# EAGLE board Mug Temperature Sensor (EAGLE 5.11)
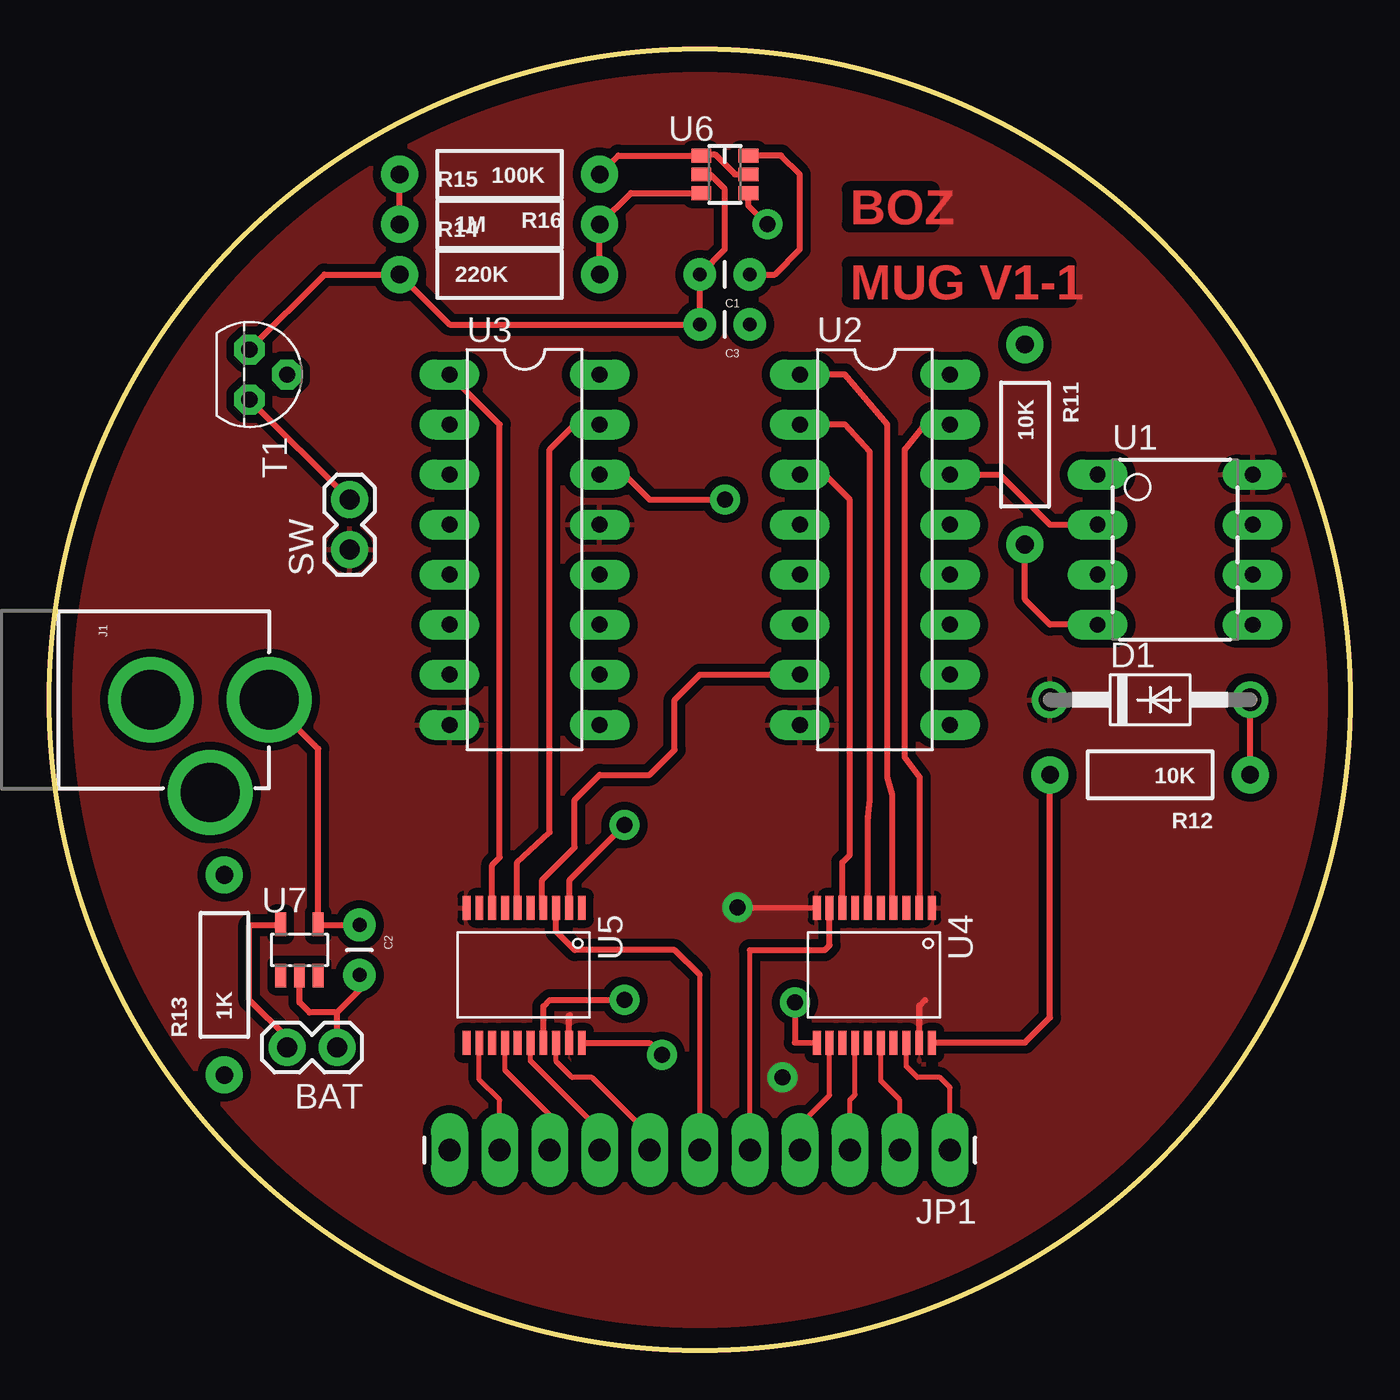
[diagram p0: board, top side]
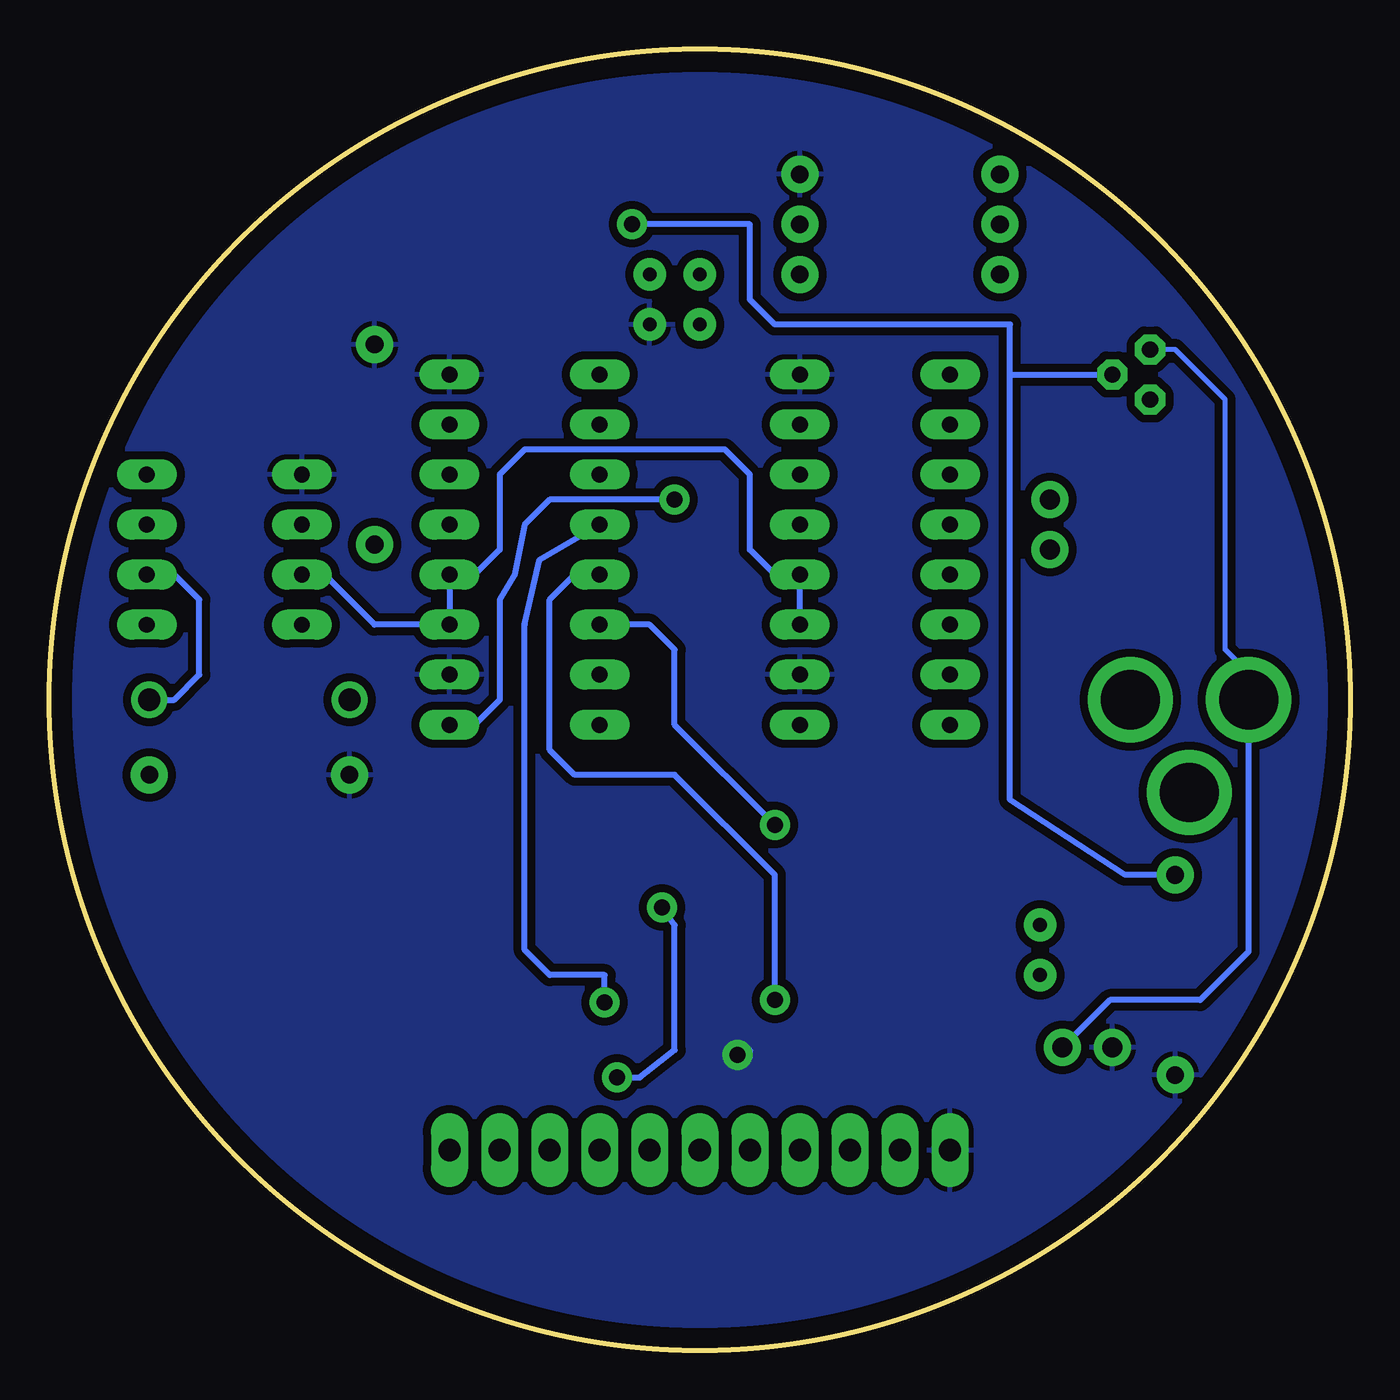
[diagram p1: board, bottom side, seen from below]

Size 66.04 x 66.04 mm. Coordinates in mm from the lower left corner, seen from the top.
Outline: circle at 33.02,33.02 radius 33.02
Copper layers (1*16): Top 0.035mm / dielectric 1.5mm / Bottom 0.035mm
Design rules "default *": minimum track width 8mil, minimum drill 24mil, track to track 8mil, track to pad 8mil, pad to pad 8mil, via to via 8mil, smd to smd 8mil, copper to edge 40mil, drill to drill 8mil, minimum pad ring 14mil, minimum via ring 14mil, stop-mask expansion 4mil, vias tented up to drill 0mil, thermal gap 10mil

## Footprints (pad centres in the part's own frame; a part is rotated, then mirrored left to right if it is on the bottom)
1X02 = drill 1.016 pad 1.88 round: 1 0,0; 2 2.54,0
CAP-PTH-SMALL = drill 0.7 pad 1.651 round: 1 0,0; 2 2.54,0
DO41-10 = drill 1.118 round: A 5.08,0; C -5.08,0
POWER_JACK_PTH = drill 2.997 pad 4.318 round: GND 0,7.7; GNDBREAK 4.7,10.7; PWR 0,13.7
1X11_LONGPADS = drill 1.118 pad 1.88 long: 1 0,0; 2 2.54,0; 3 5.08,0; 4 7.62,0; 5 10.16,0; 6 12.7,0; 7 15.24,0; 8 17.78,0; 9 20.32,0; 10 22.86,0; 11 25.4,0
AXIAL-0.4 = drill 0.9 pad 1.88 round: P$1 -5.08,0; P$2 5.08,0
TO92 = drill 0.813 octagon: 1 1.27,0; 2 0,1.905; 3 -1.27,0
DIP-8-300 = drill 0.8 long: 1 -3.937,3.81; 2 -3.937,1.27; 3 -3.937,-1.27; 4 -3.937,-3.81; 5 3.937,-3.81; 6 3.937,-1.27; 7 3.937,1.27; 8 3.937,3.81
DIL16 = drill 0.813 long: 1 -8.89,-3.81; 2 -6.35,-3.81; 3 -3.81,-3.81; 4 -1.27,-3.81; 5 1.27,-3.81; 6 3.81,-3.81; 7 6.35,-3.81; 8 8.89,-3.81; 9 8.89,3.81; 10 6.35,3.81; 11 3.81,3.81; 12 1.27,3.81; 13 -1.27,3.81; 14 -3.81,3.81; 15 -6.35,3.81; 16 -8.89,3.81
20-SSOP = smd 1.2 x 0.4: P$1 -3.4,2.9; P$2 -3.4,2.25; P$3 -3.4,1.6; P$4 -3.4,0.95; P$5 -3.4,0.3; P$6 -3.4,-0.35; P$7 -3.4,-1; P$8 -3.4,-1.65; P$9 -3.4,-2.3; P$10 -3.4,-2.95; P$11 3.45,-2.95; P$12 3.45,-2.3; P$13 3.45,-1.65; P$14 3.45,-1; P$15 3.45,-0.35; P$16 3.45,0.3; P$17 3.45,0.95; P$18 3.45,1.6; P$19 3.45,2.25; P$20 3.45,2.9
6-SOT23 = smd 1 x 0.7: P$1 -1.2,0.95; P$2 -1.2,0; P$3 -1.2,-0.95; P$4 1.2,-0.95; P$5 1.2,0; P$6 1.2,0.95
SOT23-5L = smd 0.55 x 1.2: 1 -0.95,-1.3; 2 0,-1.3; 3 0.95,-1.3; 4 0.95,1.3; 5 -0.95,1.3

## Placement (x,y rotation side)
BAT  [1X02]  14.61,15.37 180 top
C1  .1uF  [CAP-PTH-SMALL]  35.56,54.61 180 top
C2  .1uF  [CAP-PTH-SMALL]  15.75,21.59 270 top
C3  .1uF  [CAP-PTH-SMALL]  35.56,52.07 180 top
D1  1N4004  [DO41-10]  55.88,33.02 0 top
J1  POWER_JACKPTH  [POWER_JACK_PTH]  -2.54,33.02 270 top
JP1  M11LONGPADS  [1X11_LONGPADS]  45.72,10.16 180 top
R11  10K  [AXIAL-0.4]  49.53,45.97 270 top
R12  10K  [AXIAL-0.4]  55.88,29.21 180 top
R13  1K  [AXIAL-0.4]  8.89,19.05 90 top
R14  220K  [AXIAL-0.4]  22.86,54.61 0 top
R15  1M  [AXIAL-0.4]  22.86,57.15 0 top
R16  100K  [AXIAL-0.4]  22.86,59.69 180 top
SW  [1X02]  15.24,40.64 90 top
T1  2N3904  [TO92]  10.16,49.53 270 top
U1  PIC12F615-DIP8  [DIP-8-300]  57.15,40.64 0 top
U2  74LS595N  [DIL16]  41.91,40.64 270 top
U3  74LS595N  [DIL16]  24.13,40.64 270 top
U4  SN74LV244ADBR20SSOP  [20-SSOP]  41.91,19.05 270 top
U5  SN74LV244ADBR20SSOP  [20-SSOP]  24.13,19.05 270 top
U6  MAX16052SMD  [6-SOT23]  34.29,59.69 0 top
U7  MAX1555  [SOT23-5L]  12.7,20.32 0 top

## Library data of the parts
BAT C1-C3 J1 JP1 R11-R16 SW = SparkFun
D1 = diode
T1 = transistor
U1 U4-U6 = boztalay_custom
U2 U3 = 74xx-us
U7 = maxim; MF: MAXIM; MPN: MAX1555EZK+T; OC_FARNELL: 1628222; OC_NEWARK: 59J2761

## Nets
2_GND: D1.C SW.1 U1.8 U2.8 U3.8 U3.13 U4.P$1 U4.P$10 U4.P$19 U5.P$10 U5.P$19
GND: BAT.1 C1.2 C2.2 C3.2 J1.GND R14.P$1 T1.3 U6.P$2 U7.2
N$1: U1.3 U2.11 U2.12 U3.11 U3.12
N$2: U1.2 U2.14
N$3: U2.9 U3.14
N$5: U2.13
N$6: JP1.10 U5.P$12
N$7: JP1.9 U5.P$14
N$8: JP1.8 U5.P$16
N$9: U5.P$9
N$10: JP1.7 U5.P$18
N$11: JP1.6 U5.P$3
N$12: U2.5 U5.P$17
N$13: U3.15 U5.P$6
N$14: U2.6 U5.P$2
N$16: U2.4 U4.P$11
N$17: U2.2 U4.P$6
N$19: U2.15 U4.P$2
N$22: U2.7 U5.P$4
N$25: U3.1 U5.P$8
N$26: JP1.1 U4.P$18
N$27: JP1.2 U4.P$16
N$28: JP1.3 U4.P$14
N$29: JP1.4 U4.P$12
N$30: JP1.5 U4.P$9
N$32: U2.3 U4.P$8
N$34: R11.P$2 U1.4
N$35: D1.A R12.P$1 U1.6
N$36: C2.1 J1.PWR U7.4
N$37: R13.P$2 T1.2 U6.P$4
N$38: C1.1 U6.P$6
N$39: R14.P$2 R15.P$2 U6.P$3
N$40: R15.P$1 R16.P$2
N$41: SW.2 T1.1
N$42: U2.1 U4.P$4
VCC: BAT.2 C3.1 JP1.11 R11.P$1 R12.P$2 R13.P$1 R16.P$1 U1.1 U2.10 U2.16 U3.10 U3.16 U4.P$20 U5.P$20 U6.P$1 U6.P$5 U7.5

## Tracks (layer width: path | path; a pad name or v marks a point on that pad's centre or on a via)
2_GND  (via drill 0.81)
  Top 0.305: U4.P$19 44.16,17.49 44.45,17.78 | U5.P$19 26.38,16.98 26.42,17.02 | v34.92,22.48 U4.P$10
  Bottom 0.305: v34.92,22.48 34.29,21.59 34.29,15.24 36.07,13.84 v37.21,13.84
  pour Top (isolate 0.406): 0,66.04 66.04,66.04 66.04,0 0,0
GND
  Top 0.305: U6.P$2 33.53,59.69 34.29,58.93 34.29,55.88 C1.2 C3.2 20.32,52.07 R14.P$1 13.97,54.61 T1.3 | C2.2 15.75,18.29 14.61,17.14 | 14.61,17.14 13.21,17.14 12.7,17.65 U7.2 | BAT.1 14.61,17.14
  Bottom 0.254: J1.GND 5.16,34.37 6.35,35.56 6.35,48.26 8.89,50.8 T1.3
  Bottom 0.305: J1.GND 5.16,20.24 7.62,17.78 12.19,17.78 BAT.1
N$1
  Bottom 0.305: U1.3 52.07,39.37 49.53,36.83 U2.11 U2.12 44.45,39.37 43.18,40.64 43.18,44.45 41.91,45.72 31.75,45.72 30.48,44.45 30.48,40.64 29.21,39.37 U3.12 U3.11
N$2
  Top 0.305: U1.2 50.8,41.91 48.26,44.45 U2.14
N$3  (via drill 0.81)
  Top 0.305: v34.29,43.18 30.48,43.18 29.21,44.45 U3.14
  Bottom 0.305: U2.9 44.45,31.75 43.18,33.02 43.18,38.1 42.42,39.37 41.91,41.91 40.64,43.18 v34.29,43.18
N$6
  Top 0.254: U5.P$12 21.83,13.73 22.86,12.7 JP1.10
N$7
  Top 0.254: U5.P$14 23.13,14.21 25.4,11.94 JP1.9
N$8
  Top 0.254: U5.P$16 24.43,14.69 27.81,11.3 27.81,10.29 JP1.8
N$10
  Top 0.254: U5.P$18 25.73,14.66 26.54,13.84 27.56,13.84 30.48,10.92 JP1.7
N$11
  Top 0.254: JP1.6 33.02,19.05
  Top 0.305: U5.P$3 25.73,21.26 26.67,20.32 31.75,20.32 33.02,19.05
N$12  (via drill 0.81)
  Top 0.305: U5.P$17 25.08,17.46 25.4,17.78 v29.21,17.78
  Bottom 0.305: v29.21,17.78 29.21,24.13 34.29,29.21 39.37,29.21 40.64,30.48 40.64,38.1 39.37,39.37 U2.5
N$13
  Top 0.305: U3.15 26.67,46.99 25.4,45.72 25.4,26.29 23.75,24.77 23.75,22.55 U5.P$6
N$14  (via drill 0.81)
  Top 0.305: v29.21,26.67 26.42,23.88 26.42,22.49 U5.P$2
  Bottom 0.305: U2.6 35.56,36.83 34.29,35.56 34.29,31.75 v29.21,26.67
N$16  (via drill 0.81)
  Top 0.305: v37.85,17.65 37.85,15.62 U4.P$11
  Bottom 0.305: U2.4 41.15,40.13 41.91,36.83 41.91,20.32 40.64,19.05 37.85,19.05 v37.85,17.65
N$17
  Top 0.305: U4.P$6 41.56,27.02 41.66,27.94 41.66,45.59 40.39,46.99 U2.2
N$19
  Top 0.305: U2.15 44.45,46.99 43.43,45.72 43.43,30.1 44.2,29.08 44.2,22.49 U4.P$2
N$22
  Top 0.305: U2.7 33.02,34.29 31.75,33.02 31.75,30.48 30.48,29.21 27.94,29.21 26.67,27.94 26.67,25.53 25.02,23.88 25.02,22.39 U5.P$4
N$25
  Top 0.305: U3.1 22.86,46.99 22.86,25.02 22.48,24.64 U5.P$8
N$26
  Top 0.254: U4.P$18 43.51,14.4 44.07,13.84 45.21,13.84 45.72,13.34 JP1.1
N$27
  Top 0.254: U4.P$16 42.21,13.67 43.18,12.7 JP1.2
N$28
  Top 0.254: U4.P$14 40.91,12.97 40.64,12.7 JP1.3
N$29
  Top 0.254: U4.P$12 39.61,12.94 38.1,11.43 JP1.4
N$30
  Top 0.254: JP1.5 35.56,20.32
  Top 0.305: U4.P$9 39.61,20.56 39.37,20.32 35.56,20.32
N$32
  Top 0.305: U2.3 39.37,44.45 40.64,43.18 40.64,25.15 40.26,24.77 U4.P$8
N$34
  Top 0.305: R11.P$2 49.53,38.1 50.8,36.83 U1.4
N$35
  Top 0.305: R12.P$1 D1.A
  Bottom 0.305: D1.A 59.69,33.02 58.42,34.29 58.42,38.1 59.69,39.37 U1.6
N$36
  Top 0.305: C2.1 13.68,21.59 U7.4 13.65,30.53 J1.PWR
N$37  (via drill 0.81)
  Top 0.305: U6.P$4 35.49,58.11 v36.45,57.15
  Bottom 0.305: 17.27,49.53 T1.2 | 17.27,49.53 17.27,52.07 29.21,52.07 30.48,53.34 30.48,57.15 v36.45,57.15 | R13.P$2 11.43,24.13 17.27,27.94 17.27,49.53
N$38
  Top 0.305: U6.P$6 37.15,60.64 38.1,59.69 38.1,55.88 36.83,54.61 C1.1
N$39
  Top 0.305: U6.P$3 29.53,58.74 R15.P$2 R14.P$2
N$40
  Top 0.305: R15.P$1 R16.P$2
N$41
  Top 0.305: T1.1 SW.2
N$42
  Top 0.305: U2.1 40.39,49.53 42.55,46.99 42.55,29.08 42.8,28.19 42.8,22.51 U4.P$4
VCC  (via drill 0.81)
  Top 0.305: R12.P$2 50.8,16.89 49.53,15.62 44.83,15.62 U4.P$20 | U6.P$5 34.8,59.69 33.78,60.71 33.16,60.71 U6.P$1 28.89,60.64 R16.P$1 | BAT.2 12.06,15.88 10.16,17.78 10.16,21.59 11.72,21.59 U7.5 | U5.P$20 30.46,15.6 v31.11,14.99
  Bottom 0.305: 30.48,14.86 30.48,15.24 v31.11,14.99
  pour Bottom (isolate 0.406): 0,66.04 66.04,66.04 66.04,0 0,0

## Text on the board
Top: BOZ | MUG V1-1